# EAGLE board 1906252155-Dev Board (EAGLE 9.4.2)
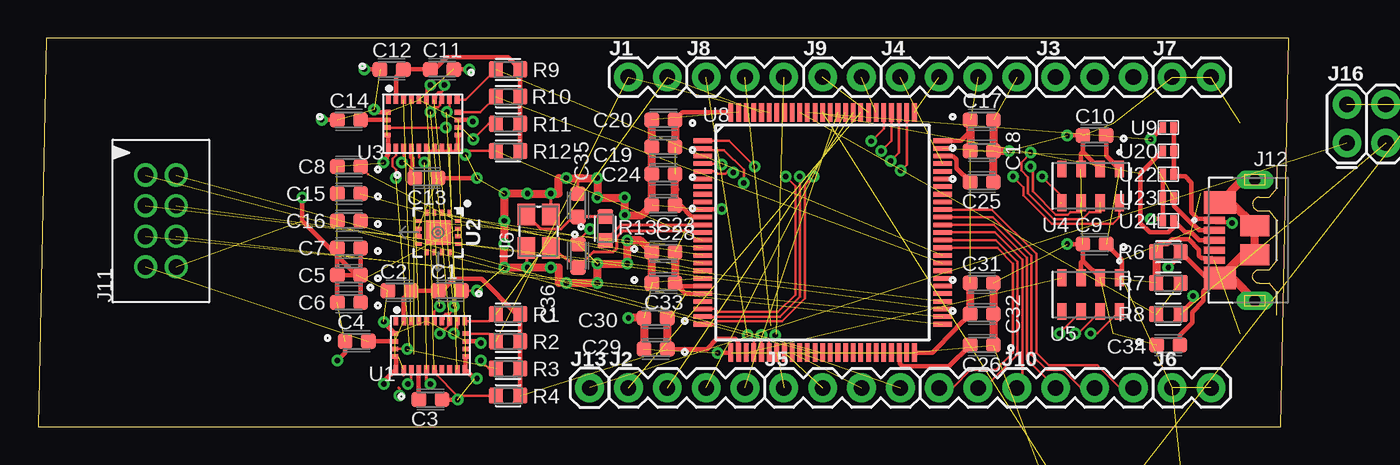
[diagram p0: board, top side]
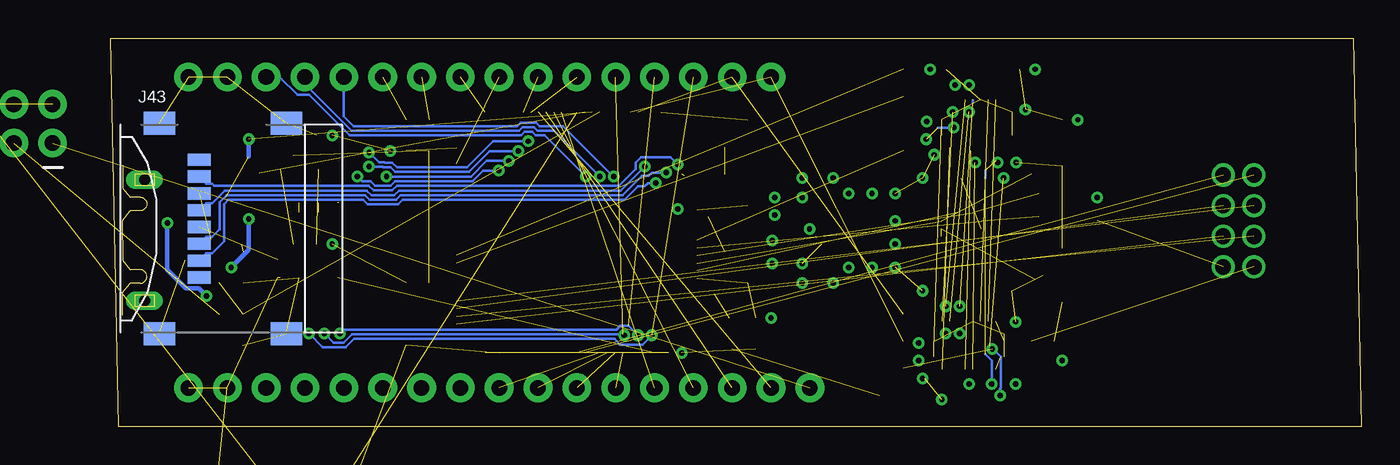
[diagram p1: board, bottom side, seen from below]

Size 81.79 x 25.4 mm. Coordinates in mm from the lower left corner, seen from the top.
Outline: 0,0 81.28,0 81.79,25.4 0.51,25.4 0,0
Copper layers (1*16): Top 0.035mm / dielectric 1.5mm / Bottom 0.035mm
Design rules "default": minimum track width 6mil, minimum drill 0.35mm, track to track 6mil, track to pad 6mil, pad to pad 6mil, via to via 6mil, smd to smd 6mil, copper to edge 40mil, drill to drill 6mil, minimum pad ring 10mil, minimum via ring 8mil, stop-mask expansion 4mil, vias tented up to drill 0mil, thermal gap 10mil

## Footprints (pad centres in the part's own frame; a part is rotated, then mirrored left to right if it is on the bottom)
CAPC1608X95N = smd 0.95 x 0.97: 1 -0.76,0; 2 0.76,0
1X02 = drill 1.016 pad 1.88: 1 0,0; 2 2.54,0
1X04 = drill 1.016 pad 1.88: 1 0,0; 2 2.54,0; 3 5.08,0; 4 7.62,0
1X03 = drill 1.016 pad 1.88: 1 0,0; 2 2.54,0; 3 5.08,0
1X06 = drill 1.016 pad 1.88: 1 0,0; 2 2.54,0; 3 5.08,0; 4 7.62,0; 5 10.16,0; 6 12.7,0
87831-0819 = drill 1.016: 1 8.325,4.15; 2 6.325,4.15; 3 4.325,4.15; 4 2.325,4.15; 5 8.325,2.15; 6 6.325,2.15; 7 4.325,2.15; 8 2.325,2.15
MOLEX_105164-0001 = smd 0.45 x 1.38: 1 1.3,4.11; 2 0.65,4.11; 3 0,4.11; 4 -0.65,4.11; 5 -1.3,4.11 | drill 0.7 long: SH1 -3.95,1.45; SH6 3.95,1.45 | smd 1.475 x 2.1: SH2 -2.462,3.75; SH5 2.462,3.75 | smd 1.375 x 1.9: SH3 -0.938,1.45; SH4 0.938,1.45
1X01 = drill 1.016 pad 1.88: 1 0,0
2X3 = drill 1.016 pad 1.88: 1 0,0; 2 0,2.54; 3 2.54,0; 4 2.54,2.54; 5 5.08,0; 6 5.08,2.54
MOLEX_47219-2001 = smd 0.8 x 1.5: 1 3.2,-2.1; 2 2.1,-2.1; 3 1,-2.1; 4 -0.1,-2.1; 5 -1.2,-2.1; 6 -2.3,-2.1; 7 -3.4,-2.1; 8 -4.5,-2.1 | smd 1.5 x 2.05: G1 6.875,-4.7; G2 6.875,3.6; G3 -6.875,3.6; G4 -6.875,-4.7
INDC1608X95N = smd 0.9 x 0.97: 1 -0.785,0; 2 0.785,0
RESC1608X50N = smd 0.94 x 1.02: 1 -0.79,0; 2 0.79,0
LGA28R50P4X10_380X520X100 = smd 0.3 x 0.525: 1 -2.25,1.562; 6 -2.25,-1.562; 7 -1.75,-1.562; 8 -1.25,-1.562; 9 -0.75,-1.562; 10 -0.25,-1.562; 11 0.25,-1.562; 12 0.75,-1.562; 13 1.25,-1.562; 14 1.75,-1.562; 15 2.25,-1.562; 20 2.25,1.562; 21 1.75,1.562; 22 1.25,1.562; 23 0.75,1.562; 24 0.25,1.562; 25 -0.25,1.562; 26 -0.75,1.562; 27 -1.25,1.562; 28 -1.75,1.562 | smd 0.425 x 0.3: 2 -2.312,0.75; 3 -2.312,0.25; 4 -2.312,-0.25; 5 -2.312,-0.75; 16 2.312,-0.75; 17 2.312,-0.25; 18 2.312,0.25; 19 2.312,0.75
LFCSP-16-3X3 = smd 0.4 x 0.25: 1 -1.3,0.75; 2 -1.3,0.25; 3 -1.3,-0.25; 4 -1.3,-0.75; 9 1.3,-0.75; 10 1.3,-0.25; 11 1.3,0.25; 12 1.3,0.75 | smd 0.25 x 0.4: 5 -0.75,-1.3; 6 -0.25,-1.3; 7 0.25,-1.3; 8 0.75,-1.3; 13 0.75,1.3; 14 0.25,1.3; 15 -0.25,1.3; 16 -0.75,1.3 | smd 1.6 x 1.6: EXP 0,0
TE_MS860702BA01-50 = smd 1.1 x 0.6: 1 -1.1,1.875; 2 -1.1,0.625; 3 -1.1,-0.625; 4 -1.1,-1.875; 5 1.1,-1.875; 6 1.1,-0.625; 7 1.1,0.625; 8 1.1,1.875
TSX-3225 = smd 1.4 x 1.15: 1 0,0; 2 2.2,0; 3 2.2,1.6; 4 0,1.6
TPS62172 = smd 0.5 x 0.25: 1 -0.01,1.5; 2 -0.01,1; 3 -0.01,0.5; 4 -0.01,0; 5 1.9,0; 6 1.9,0.5; 7 1.9,1; 8 1.9,1.5 | smd 0.9 x 1.6: THERMAL@1 0.95,0.75 | drill 0.2 pad 0.254: THERMAL@2 0.95,1.3; THERMAL@3 0.95,0.2
LQFP100_14X14 = smd 1.2 x 0.3: 1 -7.85,6; 2 -7.85,5.5; 3 -7.85,5; 4 -7.85,4.5; 5 -7.85,4; 6 -7.85,3.5; 7 -7.85,3; 8 -7.85,2.5; 9 -7.85,2; 10 -7.85,1.5; 11 -7.85,1; 12 -7.85,0.5; 13 -7.85,0; 14 -7.85,-0.5; 15 -7.85,-1; 16 -7.85,-1.5; 17 -7.85,-2; 18 -7.85,-2.5; 19 -7.85,-3; 20 -7.85,-3.5; 21 -7.85,-4; 22 -7.85,-4.5; 23 -7.85,-5; 24 -7.85,-5.5; 25 -7.85,-6; 51 7.85,-6; 52 7.85,-5.5; 53 7.85,-5; 54 7.85,-4.5; 55 7.85,-4; 56 7.85,-3.5; 57 7.85,-3; 58 7.85,-2.5; 59 7.85,-2; 60 7.85,-1.5; 61 7.85,-1; 62 7.85,-0.5; 63 7.85,0; 64 7.85,0.5; 65 7.85,1; 66 7.85,1.5; 67 7.85,2; 68 7.85,2.5; 69 7.85,3; 70 7.85,3.5; 71 7.85,4; 72 7.85,4.5; 73 7.85,5; 74 7.85,5.5; 75 7.85,6 | smd 0.3 x 1.2: 26 -6,-7.85; 27 -5.5,-7.85; 28 -5,-7.85; 29 -4.5,-7.85; 30 -4,-7.85; 31 -3.5,-7.85; 32 -3,-7.85; 33 -2.5,-7.85; 34 -2,-7.85; 35 -1.5,-7.85; 36 -1,-7.85; 37 -0.5,-7.85; 38 0,-7.85; 39 0.5,-7.85; 40 1,-7.85; 41 1.5,-7.85; 42 2,-7.85; 43 2.5,-7.85; 44 3,-7.85; 45 3.5,-7.85; 46 4,-7.85; 47 4.5,-7.85; 48 5,-7.85; 49 5.5,-7.85; 50 6,-7.85; 76 6,7.85; 77 5.5,7.85; 78 5,7.85; 79 4.5,7.85; 80 4,7.85; 81 3.5,7.85; 82 3,7.85; 83 2.5,7.85; 84 2,7.85; 85 1.5,7.85; 86 1,7.85; 87 0.5,7.85; 88 0,7.85; 89 -0.5,7.85; 90 -1,7.85; 91 -1.5,7.85; 92 -2,7.85; 93 -2.5,7.85; 94 -3,7.85; 95 -3.5,7.85; 96 -4,7.85; 97 -4.5,7.85; 98 -5,7.85; 99 -5.5,7.85; 100 -6,7.85
SOD882 = smd 0.4 x 0.7: 1 -0.35,0; 2 0.35,0

## Placement (x,y rotation side)
C1  120nF  [CAPC1608X95N]  26.92,8.89 180 top
C2  6.8nF  [CAPC1608X95N]  23.62,8.89 0 top
C3  100nF  [CAPC1608X95N]  25.65,1.78 0 top
C4  100nF  [CAPC1608X95N]  20.83,5.59 0 top
C5  100nF  [CAPC1608X95N]  20.32,9.91 180 top
C6  100nF  [CAPC1608X95N]  20.32,8.13 180 top
C7  10uF  [CAPC1608X95N]  20.32,11.68 180 top
C8  .005uF  [CAPC1608X95N]  20.32,17.02 180 top
C9  100nF  [CAPC1608X95N]  69.09,11.94 180 top
C10  100nF  [CAPC1608X95N]  69.09,19.05 180 top
C11  120nF  [CAPC1608X95N]  26.42,23.37 180 top
C12  6.8nF  [CAPC1608X95N]  23.11,23.37 0 top
C13  100nF  [CAPC1608X95N]  25.4,16.26 0 top
C14  100nF  [CAPC1608X95N]  20.32,20.07 0 top
C15  .005uF  [CAPC1608X95N]  20.32,15.24 180 top
C16  .005uF  [CAPC1608X95N]  20.32,13.46 180 top
C17  100nF  [CAPC1608X95N]  61.72,20.07 0 top
C18  4.7uF  [CAPC1608X95N]  61.72,18.03 0 top
C19  100nF  [CAPC1608X95N]  40.89,18.29 180 top
C20  4.7uF  [CAPC1608X95N]  40.89,20.07 180 top
C21  10 uF  [CAPC1608X95N]  68.07,-14.48 0 top  (outside the outline)
C23  100nF  [CAPC1608X95N]  40.89,14.48 180 top
C24  4.7uF  [CAPC1608X95N]  40.89,16.51 180 top
C25  2.2uF  [CAPC1608X95N]  61.72,16 0 top
C26  2.2uF  [CAPC1608X95N]  61.72,5.33 180 top
C27  22uF  [CAPC1608X95N]  75.44,-13.97 0 top  (outside the outline)
C28  1uF  [CAPC1608X95N]  40.89,11.43 0 top
C29  100nF  [CAPC1608X95N]  40.39,5.08 180 top
C30  4.7uF  [CAPC1608X95N]  40.39,7.11 180 top
C31  100nF  [CAPC1608X95N]  61.72,9.4 0 top
C32  4.7uF  [CAPC1608X95N]  61.72,7.37 0 top
C33  10nF  [CAPC1608X95N]  40.89,9.4 0 top
C34  4.7nF  [CAPC1608X95N]  73.91,5.33 0 top
C35  8pF  [CAPC1608X95N]  35.31,14.48 90 top
C36  8pF  [CAPC1608X95N]  35.31,11.18 270 top
J1  I2C1  [1X02]  38.61,22.86 0 top
J2  P0-P3  [1X04]  38.61,2.54 0 top
J3  A0-A3  [1X03]  66.55,22.86 0 top
J4  Debug  [1X04]  56.39,22.86 0 top
J5  P4-P7  [1X04]  48.77,2.54 0 top
J6  VCC  [1X02]  74.17,2.54 0 top
J7  GND  [1X02]  74.17,22.86 0 top
J8  SPI1  [1X03]  43.69,22.86 0 top
J9  UART5  [1X02]  51.31,22.86 0 top
J10  P8-P13  [1X06]  58.93,2.54 0 top
J11  [87831-0819]  11.18,8.13 90 top
J12  105164-0001  [MOLEX_105164-0001]  81.03,12.19 90 top
J13  VIN  [1X01]  36.07,2.54 0 top
J16  Header 3x2  [2X3]  85.6,18.54 0 top  (outside the outline)
J43  47219-2001  [MOLEX_47219-2001]  73.91,12.95 270 bottom
L1  2.2uH  [INDC1608X95N]  63.5,-7.37 0 top  (outside the outline)
R1  40kΩ  [RESC1608X50N]  30.73,7.37 0 top
R2  40kΩ  [RESC1608X50N]  30.73,5.59 0 top
R3  10kΩ  [RESC1608X50N]  30.73,3.81 0 top
R4  10kΩ  [RESC1608X50N]  30.73,2.03 0 top
R5  100k  [RESC1608X50N]  74.42,-7.37 0 top  (outside the outline)
R6  1M  [RESC1608X50N]  73.91,11.43 180 top
R7  59k  [RESC1608X50N]  73.91,9.4 0 top
R8  42.2k  [RESC1608X50N]  73.91,7.37 0 top
R9  40kΩ  [RESC1608X50N]  30.73,23.37 0 top
R10  40kΩ  [RESC1608X50N]  30.73,21.59 0 top
R11  10kΩ  [RESC1608X50N]  30.73,19.81 0 top
R12  10kΩ  [RESC1608X50N]  30.73,18.03 0 top
R13  [RESC1608X50N]  37.08,12.95 270 top
U1  BNO055  [LGA28R50P4X10_380X520X100]  25.65,5.33 0 top
U2  ADXL377  [LFCSP-16-3X3]  26.16,12.7 270 top
U3  BNO055  [LGA28R50P4X10_380X520X100]  25.15,19.81 0 top
U4  MS5607-02BA03  [TE_MS860702BA01-50]  68.83,15.75 270 top
U5  MS5607-02BA03  [TE_MS860702BA01-50]  68.83,8.64 270 top
U6  TSX-3225  [TSX-3225]  33.53,11.68 90 top
U7  TPS62172  [TPS62172]  67.56,-9.65 0 top  (outside the outline)
U8  STM32F767VIT6  [LQFP100_14X14]  51.31,12.7 0 top
U9  PESD3V3S1UL  [SOD882]  73.91,19.56 0 top
U20  PESD3V3S1UL  [SOD882]  73.91,18.03 0 top
U22  PESD3V3S1UL  [SOD882]  73.91,16.51 0 top
U23  PESD3V3S1UL  [SOD882]  73.91,14.99 0 top
U24  PESD3V3S1UL  [SOD882]  73.91,13.46 0 top

## Library data of the parts
C1-C21 C23-C36 = CGA3E2X7R1H104K080AD; AVAILABILITY: Unavailable; DESCRIPTION: CGA Series 0603 0.1 uF 50 V ±10% X7R SMT Multilayer Ceramic Capacitor; MF: TDK; MP: CGA3E2X7R1H104K080AD; PACKAGE: 0603 TDK; PRICE: None
J1 J3 J6-J9 J13 = SparkFun-Connectors
J2 J4 J5 = SparkFun-Connectors; PROD_ID: CONN-09696
J10 = SparkFun-Connectors; PROD_ID: CONN-08437
J11 = Molex
J12 = 105164-0001; AVAILABILITY: Unavailable; DESCRIPTION: Micro-USB B Receptacle without Flange, Top Mount, Surface Mount, Lead-Free; MF: Molex; MP: 105164-0001; PACKAGE: None; PRICE: None
J16 = SparkFun-Connectors; PROD_ID: CONN-09701
J43 = 47219-2001; AVAILABILITY: Unavailable; DESCRIPTION: Conn Micro SD Card SKT 8 POS 1.1mm Solder RA SMD 0.5A/Contact Embossed T/R; MF: Molex; MP: 47219-2001; PACKAGE: None; PRICE: None
L1 = 0603_Inductor; AVAILABILITY: Unavailable; DESCRIPTION: Inductor RF Chip Shielded Multi-Layer 10uH 5% 2MHz 30Q-Factor Ferrite 10mA 1.7Ohm DCR 0603 T/R; MF: TDK; MP: MLF1608E100J; PACKAGE: 0603 TDK; PRICE: None
R1-R4 R9-R12 = CRGH0603F221K; AVAILABILITY: Unavailable; COMMENT: 2-1879507-2; DESCRIPTION: Res Thick Film 0603 221K Ohm 1% 1/5W ±100ppm/°C Molded SMD SMD T/R; MF: TE Connectivity; MP: CRGH0603F221K; PACKAGE: 0603 TE Connectivity; PRICE: None; TE_PURCHASE_URL: https://www.te.com/usa-en/product-2-1879507-2.html?te_bu=Cor&te_type=disp&te_campaign=seda_glo_cor-seda-global-disp-prtnr-fy19-seda-model-bom-cta_sma-317_1&elqCampaignId=32493
R5-R8 R13 = 0603_Resistor; AVAILABILITY: Unavailable; COMMENT: 2-1879507-2; DESCRIPTION: Res Thick Film 0603 221K Ohm 1% 1/5W ±100ppm/°C Molded SMD SMD T/R; MF: TE Connectivity; MP: CRGH0603F221K; PACKAGE: 0603 TE Connectivity; PRICE: None; TE_PURCHASE_URL: https://www.te.com/usa-en/product-2-1879507-2.html?te_bu=Cor&te_type=disp&te_campaign=seda_glo_cor-seda-global-disp-prtnr-fy19-seda-model-bom-cta_sma-317_1&elqCampaignId=32493
U1 U3 = BNO055; AVAILABILITY: Unavailable; DESCRIPTION: BNO055 9-axis Absolute Orientation Sensor _ SiP _ w/Sensors and Sensor Fusion; MF: Bosch; MP: BNO055; PACKAGE: LGA-28 Bosch; PRICE: None
U2 = ADXL377; AVAILABILITY: Unavailable; DESCRIPTION: ADI Small, Low Power, 3-Axis +/-3g3x3x1.45mm; MF: Analog Devices; MP: ADXL377; PACKAGE: None; PRICE: None
U4 U5 = MS5607-02BA03
U6 = TSX-3225 16.0000MF09Z-AC0
U7 = TPS62172
U8 = STM32F767VIT6
U9 U20 U22-U24 = PESD3V3S1UL

## Nets
3V3: C1.2 C2.2 C4.2 C9.1 C10.1 C17.1 C18.1 C19.1 C20.1 C23.1 C24.1 C27.2 C28.2 C29.1 C30.1 C31.1 C32.1 C33.2 J4.3 J6.1 J6.2 J11.4 J43.4 L1.2 R1.2 R2.2 R3.2 R4.2 R5.2 U1.3 U1.28 U4.1 U5.1 U7.6 U8.11 U8.20 U8.21 U8.27 U8.50 U8.75 U8.100
A0_PA1: J3.1 U8.23
A1_PA2: J3.2 U8.24
A2_PA3: J3.3 U8.25
BL_IND: U1.10 U3.10
CS1_PA4: U5.4 U8.28
CS2_PB12: J11.7 U8.51
CS3_PA15: U4.5 U8.77
CS4_PE3: J43.2 U8.2
GND: C1.1 C2.1 C3.2 C4.1 C5.2 C6.2 C7.2 C8.2 C9.2 C10.2 C11.1 C12.1 C13.2 C14.1 C15.2 C16.2 C17.2 C18.2 C19.2 C20.2 C21.2 C23.2 C24.2 C25.2 C26.1 C28.1 C29.2 C30.2 C31.2 C32.2 C33.1 C34.1 C35.2 C36.1 J4.4 J7.1 J7.2 J11.8 J12.5 J43.6 J43.G1 J43.G2 J43.G3 J43.G4 R6.2 R7.1 U1.2 U1.5 U1.6 U1.15 U1.16 U1.18 U1.25 U2.6 U2.7 U3.2 U3.5 U3.6 U3.15 U3.16 U3.18 U3.25 U4.2 U4.3 U5.2 U5.3 U6.2 U6.4 U7.1 U7.4 U7.THERMAL@1 U7.THERMAL@2 U7.THERMAL@3 U8.10 U8.19 U8.26 U8.49 U8.74 U8.99
I2C_ADR_SEL: U1.17 U3.17
INT: U1.14 U3.14
MISO1_PA6: J8.2 U5.6 U8.30
MISO2_PB14: J11.6 U8.53
MISO3_PC11: U4.6 U8.79
MISO4_PE5: J43.7 U8.4
MOSI1_PA7: J8.3 U5.7 U8.31
MOSI2_PB15: J11.2 U8.54
MOSI3_PC12: U4.7 U8.80
MOSI4_PE6: J43.3 U8.5
N$1: C3.1 U1.9
N$2: U4.4
N$3: R3.1 U1.4
N$4: C25.1 U8.73
N$5: C13.1 U3.9
N$6: R11.1 U3.4
N$7: C26.2 U8.48
N$8: L1.1 U7.7
N$9: U5.5
N$11: C5.1 C6.1 C7.1 U2.14 U2.15
N$12: C27.1 U7.5
N$13: J12.4
N$14: C34.2 J12.SH1 J12.SH2 J12.SH3 J12.SH4 J12.SH5 J12.SH6 R6.1 U22.1 U23.1 U24.1
N$15: C35.1 R13.1 U6.3
N$17: J16.5
N$18: C21.1 J16.2 J16.4 J16.6 U7.2 U7.3
NRESET: R4.1 R12.1 U1.11 U3.11 U8.14
OPTIONAL_OSC_IN@1: U1.27 U3.27
OPTIONAL_OSC_IN@2: U1.26 U3.26
OSC_IN: R13.2 U8.12
OSC_OUT: C36.2 U6.1 U8.13
P0_PD2: J2.1 U8.83
P1_PD3: J2.2 U8.84
P2_PD4: J2.3 U8.85
P3_PD5: J2.4 U8.86
P4_PC4: J5.1 U8.32
P5_PC5: J5.2 U8.33
P6_PB0: J5.3 U8.34
P7_PB1: J5.4 U8.35
P8_PD14: J10.1 U8.61
P9_PD15: J10.2 U8.62
P10_PC6: J10.3 U8.63
P11_PC7: J10.4 U8.64
P12_PC8: J10.5 U8.65
P13_PC9: J10.6 U8.66
PG_PD7: R5.1 U7.8 U8.88
PIN7: U1.7 U3.7
PIN8: U1.8 U3.8
PIN21: U1.21 U3.21
PIN22: U1.22 U3.22
PIN23: U1.23 U3.23
PIN24: U1.24 U3.24
RX5_PD0: J9.2 U8.81
RX7_PE7: J11.1 U8.37
SCL1_PA5: J8.1 U5.8 U8.29
SCL1_PB8: J1.1 R2.1 U1.19 U8.95
SCL2_PB13: J11.3 U8.52
SCL3_PC10: U4.8 U8.78
SCL4_PD12: R10.1 U3.19 U8.59
SCL4_PE2: J43.5 U8.1
SDA1_PB9: J1.2 R1.1 U1.20 U8.96
SDA4_PD13: R9.1 U3.20 U8.60
ST_PC3: U2.2 U8.18
SWDIO_PA13: J4.1 U8.72
SWSLK_PA14: J4.2 U8.76
TX5_PD1: J9.1 U8.82
TX7_PE8: J11.5 U8.38
USB_5V: J12.1 J16.3 R8.2 U9.2 U20.2 U22.2
USBD+_PB3: J12.3 U8.89 U20.1 U24.2
USBD-_PB4: J12.2 U8.90 U9.1 U23.2
USBSENSE_PB5: R7.2 R8.1 U8.91
VDD: C14.2 U3.3
VDDIO: C11.2 C12.2 R9.2 R10.2 R11.2 R12.2 U3.28
VIN: J13.1 J16.1
XOUT_PC0: C16.1 U2.5 U8.15
YOUT_PC1: C15.1 U2.4 U8.16
ZOUT_PC2: C8.1 U2.16 U8.17

## Tracks (layer width: path | path; a pad name or v marks a point on that pad's centre or on a via)
3V3  (19 unrouted)
  Top 0.152: C30.1 41.35,7.11 | 45.72,4.76 U8.27 | C1.2 26.42,8.89 26.54,8.89 | U1.3
  Top 0.203: 45.31,20.99 U8.100
  Top 0.305: C1.2 C2.2 23.9,8.41 U1.28 | R4.2 R3.2 R2.2 R1.2 31.3,7.37 28.99,9.68 27.21,9.68 26.42,8.89 | C4.2 U1.3 | 70.86,9.74 70.86,10.92 C9.1 | U4.1 69.85,17.71 C10.1 | 42,14.48 C23.1 42,14.48 | U8.20 41.85,9.2 C33.2 42.35,8.7 U8.21 | U8.27 45.77,4.89 45.77,5.57 45.58,5.76 44.41,5.76 43.74,5.08 C29.1 | C32.1 60.06,6.47 60.06,6.42 58.49,4.85 U8.50 | 60.96,19.3 60.36,18.7 U8.75 | U8.11 43.41,13.74 42.73,13.74 42,14.48 | C20.1 42.14,20.55 U8.100
  Top 0.508: C28.2 C33.2 | C29.1 41.15,6.1 C30.1 | C32.1 C31.1 | C18.1 60.96,19.3 C17.1 | C20.1 C19.1 | C23.1 41.65,15.49 C24.1
A0_PA1  (via drill 0.35)
  Top 0.152: U8.23 44.25,7.7 44.45,7.51 48.4,7.51 49.53,8.64 49.53,15.72 v48.89,16.35
  Bottom 0.152: v48.89,16.35 52.2,19.66 53.75,19.66 53.98,19.88 54.99,19.88 55.21,19.66 65.91,19.66 66.55,20.3 J3.1
A1_PA2  (via drill 0.35)
  Top 0.152: v49.8,16.35 49.84,16.32 49.84,8.51 48.53,7.2 U8.24
  Bottom 0.152: v49.8,16.35 52.8,19.35 53.88,19.35 54.11,19.58 54.86,19.58 55.09,19.35 66.04,19.35 69.09,22.4 J3.2
A2_PA3  (via drill 0.35)
  Top 0.152: U8.25 44.25,6.7 44.45,6.89 48.65,6.89 50.14,8.38 50.14,15.78 v50.71,16.35
  Bottom 0.152: v50.71,16.35 53.41,19.05 54.01,19.05 54.23,19.28 54.73,19.28 54.96,19.05 66.17,19.05 68.81,21.69 69.57,21.69 70.74,22.86 J3.3
BL_IND  (via drill 0.35)  (1 unrouted)
  Top 0.152: v25.26,17.27 24.9,17.63 U3.10
  Top 0.203: v25.66,2.79 25.4,3.05 U1.10
CS1_PA4  (1 unrouted)
CS2_PB12  (1 unrouted)
CS3_PA15  (via drill 0.35)  (1 unrouted)
  Top 0.152: v56.41,16.74 56.81,17.14 U8.77 | v65.66,16.35 66.88,15.13 66.88,14.65
  Bottom 0.152: v56.41,16.74 57.43,16.74 58.12,16.05 63.2,16.05 63.5,15.75 64.49,15.75 64.79,16.05 65.36,16.05 v65.66,16.35
CS4_PE3  (via drill 0.35)
  Top 0.152: 43.58,18.08 U8.2 43.58,18.08 | 43.58,18.08 44.86,18.08 46.15,16.79 v46.15,15.93
  Bottom 0.152: J43.2 75.54,11.33 75.17,11.33 74.37,12.12 74.37,14.56 74.1,14.83 65.3,14.83 64.99,14.53 63,14.53 62.7,14.83 48.19,14.83 47.29,15.72 46.87,15.72 46.66,15.93 v46.15,15.93
CUTOUT
  cutout Top: 42.67,19.05 44.32,19.05 44.32,6.35 42.67,6.35
CUTOUT1
  cutout Top: 44.96,19.69 44.96,21.34 57.66,21.34 57.66,19.69
CUTOUT2
  cutout Top: 44.96,4.06 44.96,5.71 57.66,5.71 57.66,4.06
CUTOUT3
  cutout Top: 59.94,6.35 58.29,6.35 58.29,19.05 59.94,19.05
GND  (via drill 0.35)  (53 unrouted)
  Top 0.152: C30.2 | C1.1 v28.7,8.89 | U1.5 23.4,4.52 | C36.1 35.31,12.15 v36.09,12.93 | 40.13,11.18 C28.1
  Top 0.203: C35.2 35.31,16.26 | C36.1 35.31,12.15 | U6.2 v33.53,15.24 | U6.4 31.93,10.59 31.75,10.41 | C23.2 39.88,14.48
  Top 0.305: C13.2 v28.7,16.26 | C14.1 v18.54,20.07 | C12.1 v21.34,23.37 | C11.1 v28.19,23.37 | C4.1 20.07,4.83 v19.56,4.32 | C3.2 v27.43,1.78 | v22.58,17.27 22.8,17.5 22.8,17.68 22.9,17.78 U3.6 22.9,19 U3.5 | v27.94,17.78 27.87,17.78 U3.15 27.46,18.31 U3.16 | U3.18 28.33,20.06 v28.44,19.95 | U3.2 22.16,20.56 v21.97,20.75 | U1.16 27.97,3.83 U1.15 28.53,3.15 v28.7,3.15 | v22.61,2.79 22.61,2.97 U1.6 23.4,4.52 U1.5 | U1.2 22.61,6.82 v22.61,6.86 | U1.18 28.84,5.58 v28.94,5.48 | C6.2 C5.2 | C5.2 C7.2 | C5.2 20.83,9.91 17.27,13.46 v17.27,14.99 | U2.6 U2.7 | v67.31,11.94 C9.2 68.33,10.87 | U5.2 68.33,10.87 | U5.3 68.21,10.75 68.33,10.87 | U4.2 68.33,17.98 | 68.33,17.98 C10.2 v67.31,19.05 | U4.3 68.21,17.86 68.33,17.98 | U8.10 43.48,14.22 v44.7,14.22 | U8.26 44.47,4.85 v44.45,4.83 | J12.5 76.8,11.01 76.1,11.01 75.92,11.19 75.92,11.57 75.25,12.24 74.16,12.24 73.86,11.94 73.28,11.94
  Top 0.508: C28.1 39.38,12.18 v38.52,12.18 v38.52,10.67 v36.58,10.67 v36.58,9.4 v34.54,9.4 34.04,9.4 34.04,10.41 v33.53,10.41 v32,10.41 31.75,10.41 v30.48,10.41 30.48,11.68 v30.48,11.94 v30.48,13.46 30.48,15.2 v30.49,15.24 v32,15.24 v33.53,15.24 34.04,15.24 34.04,16.26 v34.54,16.26 35.31,16.26 35.56,16.26 v36.58,16.26 v36.58,14.99 v38.35,14.99 v38.35,13.83 39.49,13.83 C23.2 C24.2 C19.2 C20.2 | C33.1 40.13,11.18 | C29.2 C30.2 v38.61,7.11 | C31.2 C32.2 C26.1 | C25.2 C18.2 | C17.2 C18.2 | C18.2 v63.5,18.03 | R6.2 R7.1
I2C_ADR_SEL  (1 unrouted)
INT  (1 unrouted)
MISO1_PA6  (via drill 0.35)  (1 unrouted)
  Top 0.152: U8.30 v47.31,5.98 | U5.6 68.21,7.5 v66.8,6.1
  Bottom 0.152: v47.31,5.98 47.91,6.59 48.47,6.59 48.71,6.35 66.55,6.35 v66.8,6.1
MISO2_PB14  (1 unrouted)
MISO3_PC11  (via drill 0.35)  (1 unrouted)
  Top 0.152: v55.13,18.03 55.81,18.71 U8.79 | v64.9,17.02 65.05,16.86 65.05,15.38 66.56,13.87 67.35,13.87 67.51,14.02 68.21,14.02
  Bottom 0.152: v55.13,18.03 57,18.03 58.37,16.66 63.2,16.66 63.5,16.96 63.98,16.96 64,16.98 64.86,16.98 v64.9,17.02
MISO4_PE5  (via drill 0.35)
  Top 0.152: U8.4 44.65,17.2 v44.7,17.15
  Bottom 0.152: J43.7 75.54,15.88 75.17,15.88 75.03,15.75 64.92,15.75 64.61,15.45 63.38,15.45 63.07,15.75 48.56,15.75 47.47,16.84 47.47,17.27 47.11,17.62 45.18,17.62 v44.7,17.15
MOSI1_PA7  (via drill 0.35)  (1 unrouted)
  Top 0.152: U8.31 47.81,5.57 v48.22,5.98 | U5.7 68.02,6.1 v67.82,6.1
  Bottom 0.152: v48.22,5.98 48.28,6.04 66,6.04 66.55,5.49 67.21,5.49 v67.82,6.1
MOSI2_PB15  (1 unrouted)
MOSI3_PC12  (via drill 0.35)  (1 unrouted)
  Top 0.152: v54.48,18.67 55.31,19.49 U8.80 | v64.9,17.93 64.9,17.88 64.29,17.27 64.29,16.77 64.75,16.31 64.75,15.26 66.44,13.56 68.3,13.56 68.76,14.02 69.46,14.02
  Bottom 0.152: v54.48,18.67 56.79,18.67 58.49,16.97 63.07,16.97 63.38,17.27 63.86,17.27 63.88,17.29 64.26,17.29 v64.9,17.93
MOSI4_PE6  (via drill 0.35)  (1 unrouted)
  Top 0.152: 44.29,16.45 44.29,16.42 | v45.46,16.62 45.38,16.7 45.12,16.7 44.95,16.54 44.45,16.54 44.29,16.7 U8.5
  Bottom 0.152: J43.3 75.54,12.42 75.17,12.42 74.68,12.92 74.68,14.69 74.22,15.14 65.17,15.14 64.87,14.84 63.12,14.84 62.82,15.14 48.31,15.14 47.04,16.41 46.61,16.41 46.4,16.62 v45.46,16.62
N$1
  Top 0.152: C3.1 24.78,1.89
  Top 0.305: C3.1 24.89,3.76 U1.9
N$3  (via drill 0.35)  (1 unrouted)
  Top 0.152: U1.4 v24.13,5.08 | v28.96,4.32 29.46,3.81 R3.1
N$4
  Top 0.305: C25.1 60.06,16.9 60.06,17.48 59.84,17.7 U8.73
N$5
  Top 0.152: C13.1 24.4,16.5
  Top 0.305: C13.1 24.4,16.5 24.4,16.91 24.47,16.99 24.47,17.55 24.4,17.63 U3.9
N$6  (via drill 0.35)  (1 unrouted)
  Top 0.152: U3.4 v26.67,19.56 | 29.72,19.59 R11.1 29.46,19.81 v28.45,18.8
  Bottom 0.152: v26.67,19.56 27.69,19.56
N$7  (1 unrouted)
  Top 0.203: 56.39,4.77 56.36,4.8 U8.48
  Top 0.305: 56.35,4.8 56.35,4.12 56.53,3.95 59.57,3.95 C26.2
N$8  (1 unrouted)
N$11  (2 unrouted)
  Top 0.305: C5.1 21.33,9.66 | U2.15 | C6.1 C5.1 | C7.1 C5.1
N$12  (1 unrouted)
N$14  (via drill 0.35)
  Top 0.305: 78.8,13.13 J12.SH4 | 78.05,9.73 J12.SH2 77.09,9.73 | 77.09,9.73 76.4,9.73 R6.1 74.7,11.2 v73.91,10.41 | U22.1 U23.1 U24.1 73.44,13.59 v72.77,13.59 | C34.2 74.67,5.98 75.48,6.79 75.48,7.49 76.21,8.23 76.21,8.85 77.09,9.73
  Top 0.508: J12.SH6 78.76,16.14 J12.SH5 78.05,14.65 J12.SH4 J12.SH3 78.8,11.25 J12.SH2 78.09,9.73 J12.SH1
  Bottom 0.305: v72.77,13.59 72.77,11.56 v73.91,10.41
N$15
  Top 0.203: U6.3 32.7,13.11 32.7,13.08 32.85,12.93 34.21,12.93 35,13.72 C35.1 35.33,13.74 R13.1
N$18  (5 unrouted)
NRESET  (2 unrouted)
  Top 0.152: U3.11 25.52,18.13 25.52,18.03 R12.1 | U1.11 26.02,3.65 26.02,3.41 27.41,2.03 R4.1
OPTIONAL_OSC_IN@1  (1 unrouted)
OPTIONAL_OSC_IN@2  (1 unrouted)
OSC_IN
  Top 0.203: R13.2 38.12,13.2 U8.12
OSC_OUT
  Top 0.203: U6.1 C36.2 36.33,11.44 37.64,11.44 37.85,11.64 37.85,12.42 38.24,12.82 42.56,12.82 42.67,12.7 U8.13
P0_PD2  (1 unrouted)
P1_PD3  (1 unrouted)
P2_PD4  (1 unrouted)
P3_PD5  (1 unrouted)
P4_PC4  (1 unrouted)
P5_PC5  (1 unrouted)
P6_PB0  (1 unrouted)
P7_PB1  (1 unrouted)
P8_PD14
  Top 0.152: U8.61 62.72,11.7 63.75,10.67 63.75,4.83 62.64,3.71 60.98,3.71 59.82,2.54 J10.1
P9_PD15
  Top 0.152: U8.62 62.65,12.2 64.06,10.79 64.06,4.7 61.9,2.54 J10.2
P10_PC6
  Top 0.152: U8.63 62.58,12.7 64.36,10.92 64.36,2.9 J10.3
P11_PC7
  Top 0.152: U8.64 62.52,13.2 64.67,11.05 64.67,4.42 J10.4
P12_PC8
  Top 0.152: U8.65 62.45,13.7 64.97,11.17 64.97,4.7 65.97,3.71 67.03,3.71 68.2,2.54 J10.5
P13_PC9
  Top 0.152: U8.66 62.38,14.2 65.28,11.3 65.28,4.83 66.09,4.01 69.27,4.01 70.74,2.54 J10.6
PG_PD7  (2 unrouted)
PIN7  (via drill 0.35)  (2 unrouted)
  Top 0.152: 23.9,3.43 U1.7 23.9,3.38 | 23.57,2.54 23.62,2.49 v23.62,2.03 | U3.7 23.4,17.74 23.18,17.52 23.18,17.02 23.4,16.81 v23.4,16.26
  Bottom 0.152: v23.62,2.03 23.62,2.49 23.57,2.54 23.57,4.57 24.29,5.29
PIN8  (via drill 0.35)  (2 unrouted)
  Top 0.152: U1.8 24.4,3.02 v24.18,2.79 | U3.8 23.9,17.38 v23.79,17.27
  Bottom 0.152: 24.59,4.73 24.18,4.32 v24.18,2.79 | 24.59,16.26 24.59,16.76
PIN21  (via drill 0.35)  (1 unrouted)
  Top 0.152: U1.21 27.4,6.3 v27.19,6.09 | U3.21 26.9,20.76 v26.71,20.57
PIN22  (via drill 0.35)  (1 unrouted)
  Top 0.152: v26.27,6.1 26.57,6.4 26.65,6.4 26.9,6.66 U1.22 | v25.65,20.58 25.65,20.63 25.91,20.88 26.14,20.88 26.27,21.02 26.27,21.25 U3.22
PIN23  (via drill 0.35)  (1 unrouted)
  Top 0.152: v27.18,7.87 27.18,7.67 26.9,7.39 26.66,7.39 26.52,7.25 26.52,7.02 U1.23 | v26.56,22.35 26.56,22.04 26.39,21.87 26.15,21.87 26.02,21.73 26.02,21.5 U3.23
PIN24  (via drill 0.35)  (2 unrouted)
  Top 0.152: U1.24 25.9,7.51 v26.27,7.87 | U3.24 25.4,22.09 v25.65,22.35
  Bottom 0.152: 25.4,21.19 25.4,21.34
RX5_PD0  (1 unrouted)
RX7_PE7  (1 unrouted)
SCL1_PA5  (via drill 0.35)  (1 unrouted)
  Top 0.152: U8.29 46.81,5.57 v46.4,5.98 | U5.8 69.27,6.1 v68.83,6.1
  Bottom 0.152: v46.4,5.98 47.01,5.37 48.47,5.37 48.84,5.74 65.79,5.74 | 65.87,5.74 65.79,5.74 | 65.79,5.74 65.87,5.74 | 65.87,5.74 66.42,5.18 67.92,5.18 v68.83,6.1
SCL1_PB8  (2 unrouted)
  Top 0.152: R2.1 29.45,6.08 U1.19
SCL2_PB13  (1 unrouted)
SCL3_PC10  (via drill 0.35)
  Top 0.152: v55.77,17.38 56.31,17.92 U8.78 | U4.8 70.71,13.69 70.28,13.26 66.31,13.26 64.44,15.13 64.44,15.67 v63.75,16.36
  Bottom 0.152: v55.77,17.38 57.22,17.38 58.24,16.36 v63.75,16.36
SCL4_PD12  (1 unrouted)
  Top 0.152: R10.1 28.92,20.56 U3.19
SCL4_PE2  (via drill 0.35)
  Top 0.152: v46.86,17.02 45.18,18.7 U8.1
  Bottom 0.152: J43.5 75.54,14.62 75.17,14.62 74.35,15.44 65.04,15.44 64.74,15.14 63.25,15.14 62.95,15.44 48.44,15.44 v46.86,17.02
SDA1_PB9  (2 unrouted)
  Top 0.152: R1.1 29.48,6.9 U1.20
SDA4_PD13  (1 unrouted)
  Top 0.152: R9.1 27.95,21.37 U3.20
ST_PC3  (1 unrouted)
SWDIO_PA13  (1 unrouted)
SWSLK_PA14  (1 unrouted)
TX5_PD1  (1 unrouted)
TX7_PE8  (1 unrouted)
USB_5V  (via drill 0.35)  (1 unrouted)
  Top 0.305: U9.2 U20.2 U22.2 74.41,16.36 75.02,16.36 75.42,15.96 75.42,14.01 75.82,13.61 76.8,13.61 J12.1 77.04,13.37 77.73,13.37 77.78,13.33 v78.09,13.33 | R8.2 75.53,8.19 v75.53,8.55
  Bottom 0.305: v75.53,8.55 76.03,9.05 76.89,9.05 78.09,10.25 v78.09,13.33
USBD+_PB3  (1 unrouted)
  Top 0.305: J12.3 75.94,12.19 75.44,12.7 75.02,12.7 U24.2 74.26,13.05 73.91,12.7 72.69,12.7 72.09,13.31 72.09,16.56 U20.1
USBD-_PB4  (via drill 0.35)  (2 unrouted)
  Top 0.305: U23.2 74.26,14.44 75.55,13.16 75.62,13.16 75.94,12.84 J12.2 | v72.77,18.8 73.53,19.56 U9.1
  Bottom 0.305: 72.77,17.64 v72.77,18.8
USBSENSE_PB5  (2 unrouted)
VDD
  Top 0.152: U3.3
  Top 0.305: C14.2 U3.3
VDDIO
  Top 0.152: C11.2 | R9.2 31.19,23.37
  Top 0.305: C11.2 C12.2 23.4,22.89 U3.28 | R12.2 31.52,18.8 R11.2 R10.2 R9.2 30.73,24.16 26.71,24.16 25.92,23.37 C11.2
VIN  (1 unrouted)
XOUT_PC0  (2 unrouted)
  Top 0.152: C16.1 21.08,13.73
YOUT_PC1  (2 unrouted)
ZOUT_PC2  (2 unrouted)
  Top 0.152: C8.1 21.59,16.51

## Text on the board
tPlace: Via drill: 0.3mm / Via Hole: Auto